# Altium PCB PCB1.PcbDoc
Units mm, origin at the board's own origin, x right, y up, seen from the top; angles counter-clockwise.
Board outline 56.1 x 54.2 mm, 2 copper layers (Top Layer, Bottom Layer); 76 components, 101 nets, 286 pads, 89 vias.
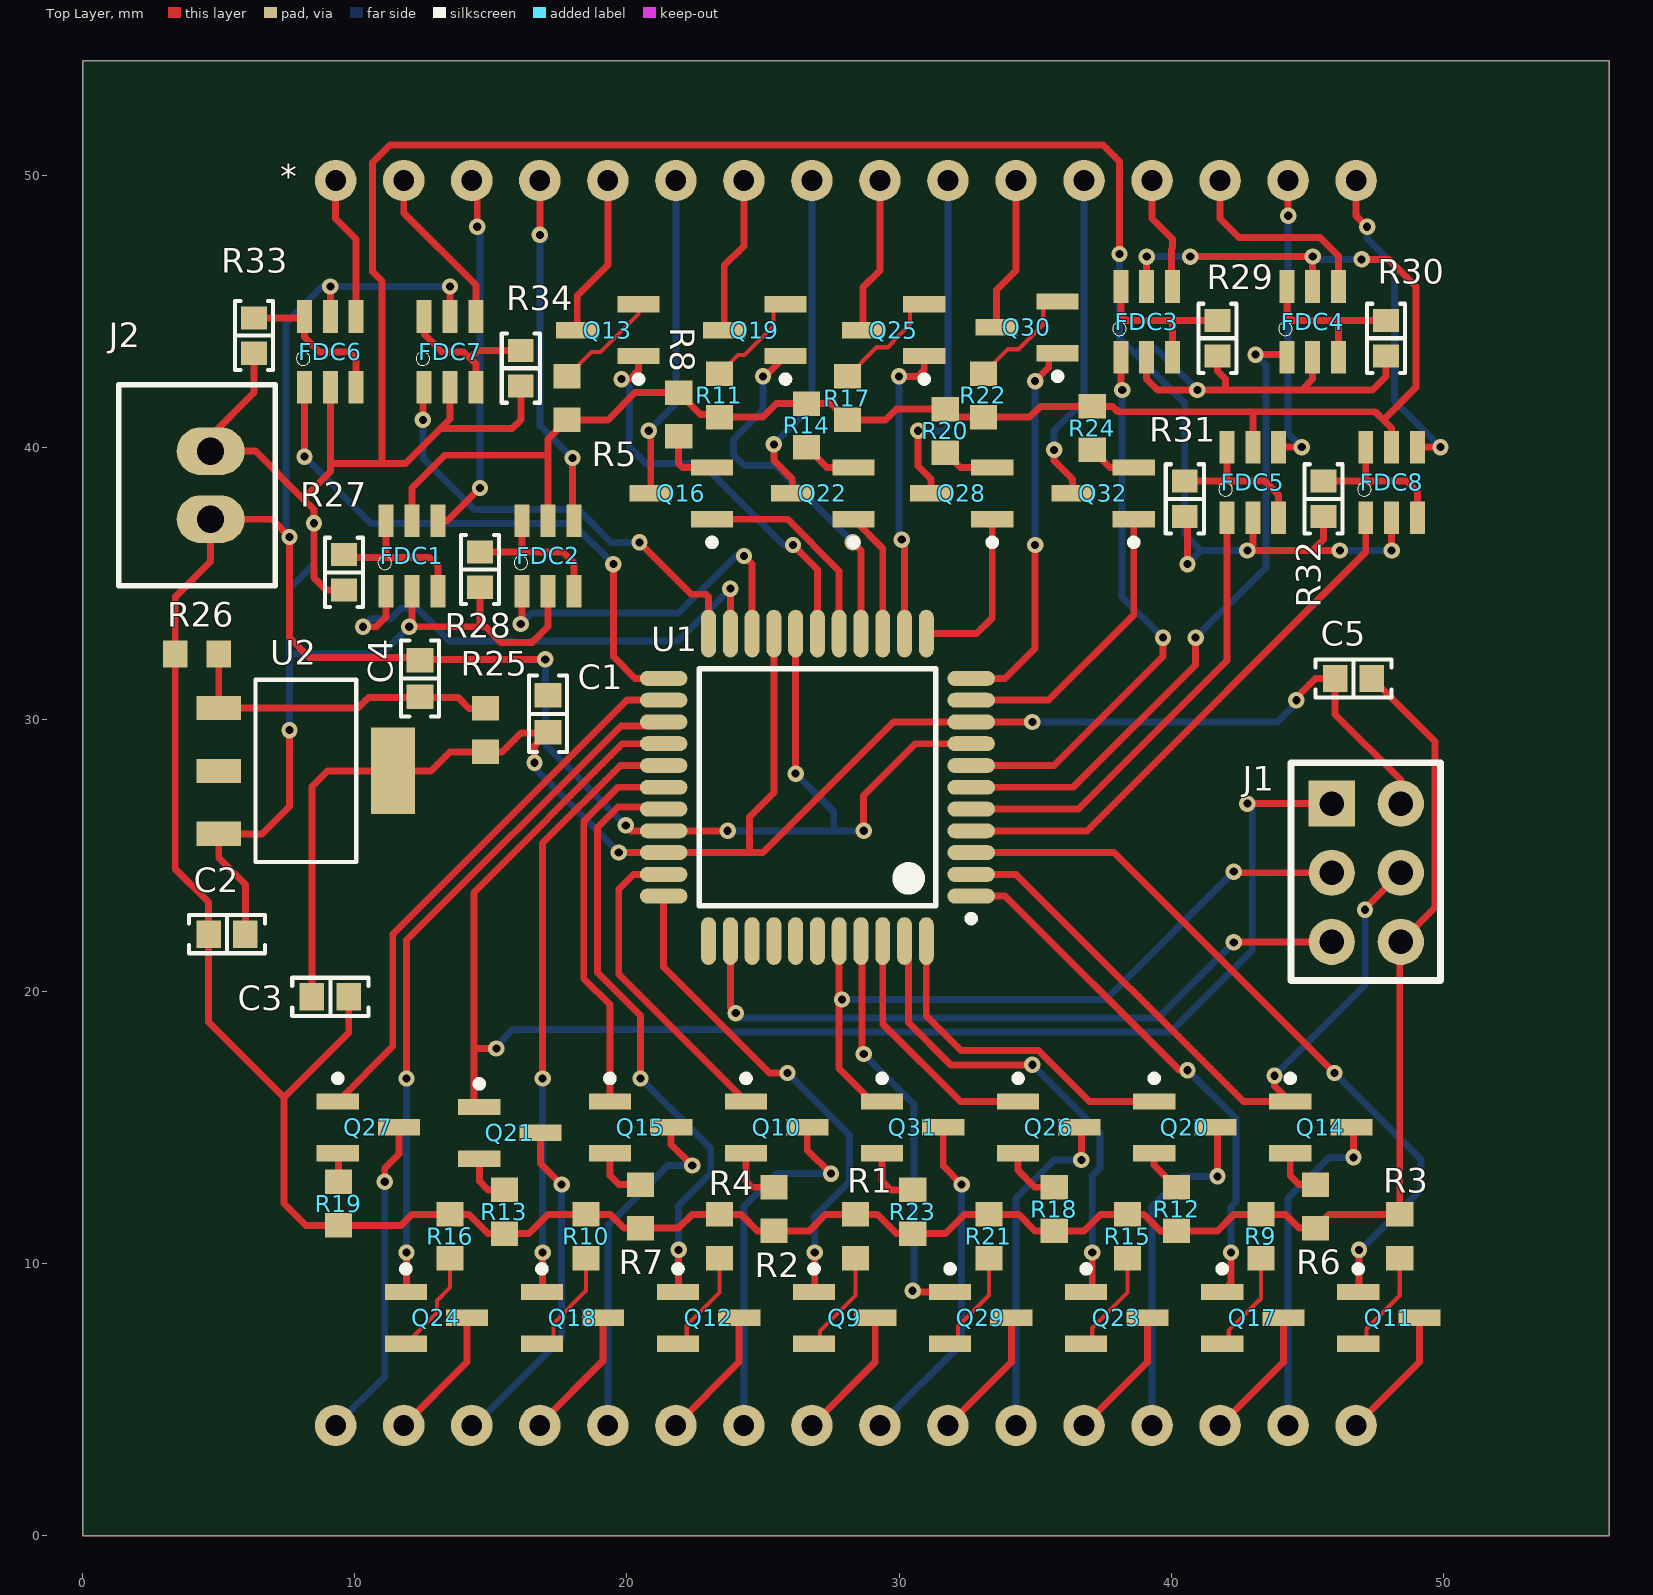
[diagram p0: Top Layer view]
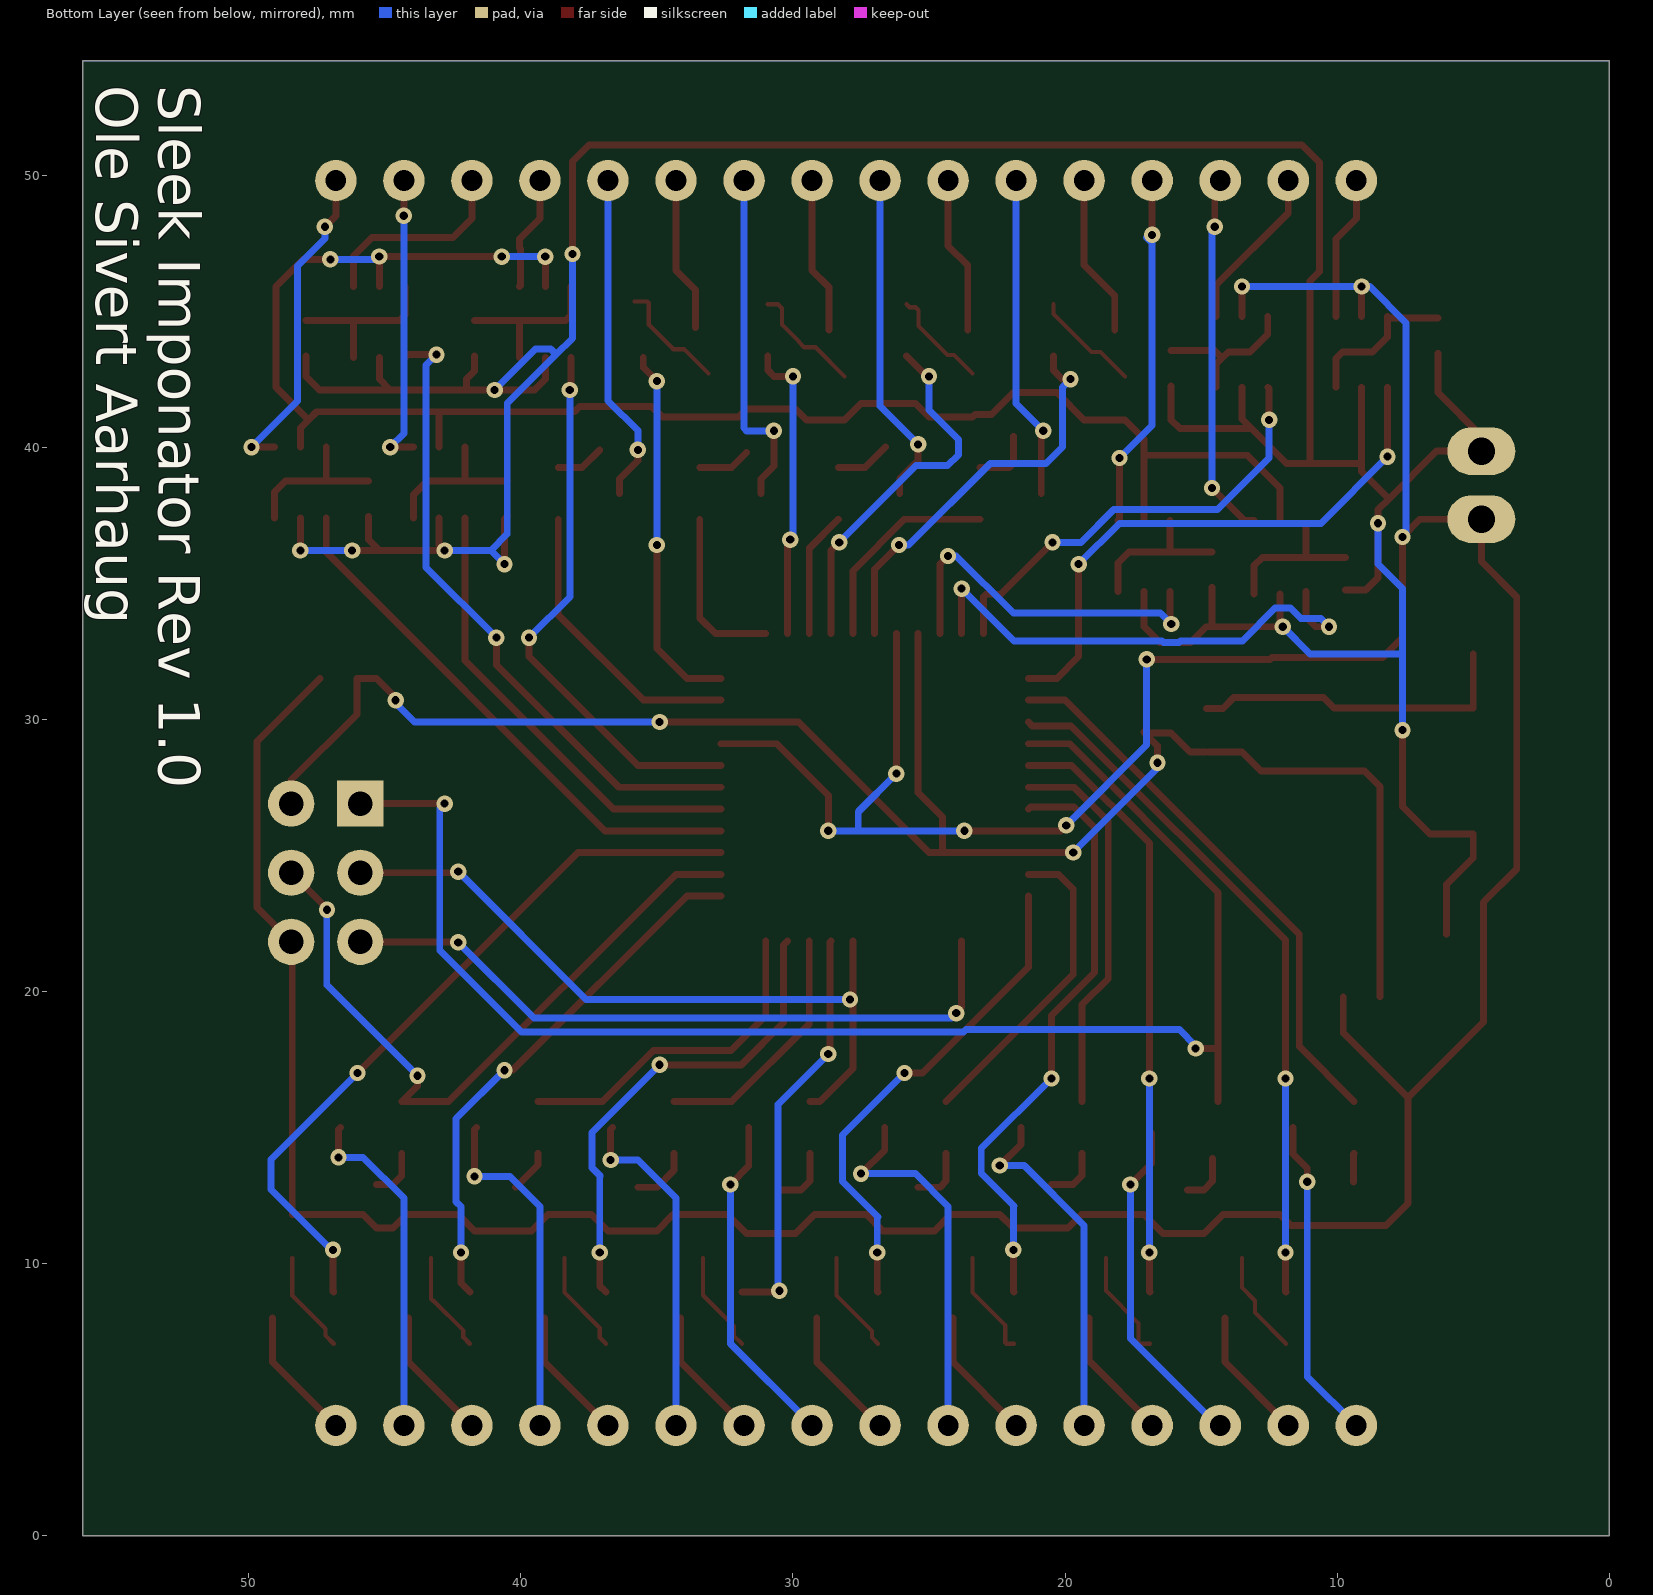
[diagram p1: Bottom Layer view, seen from below]
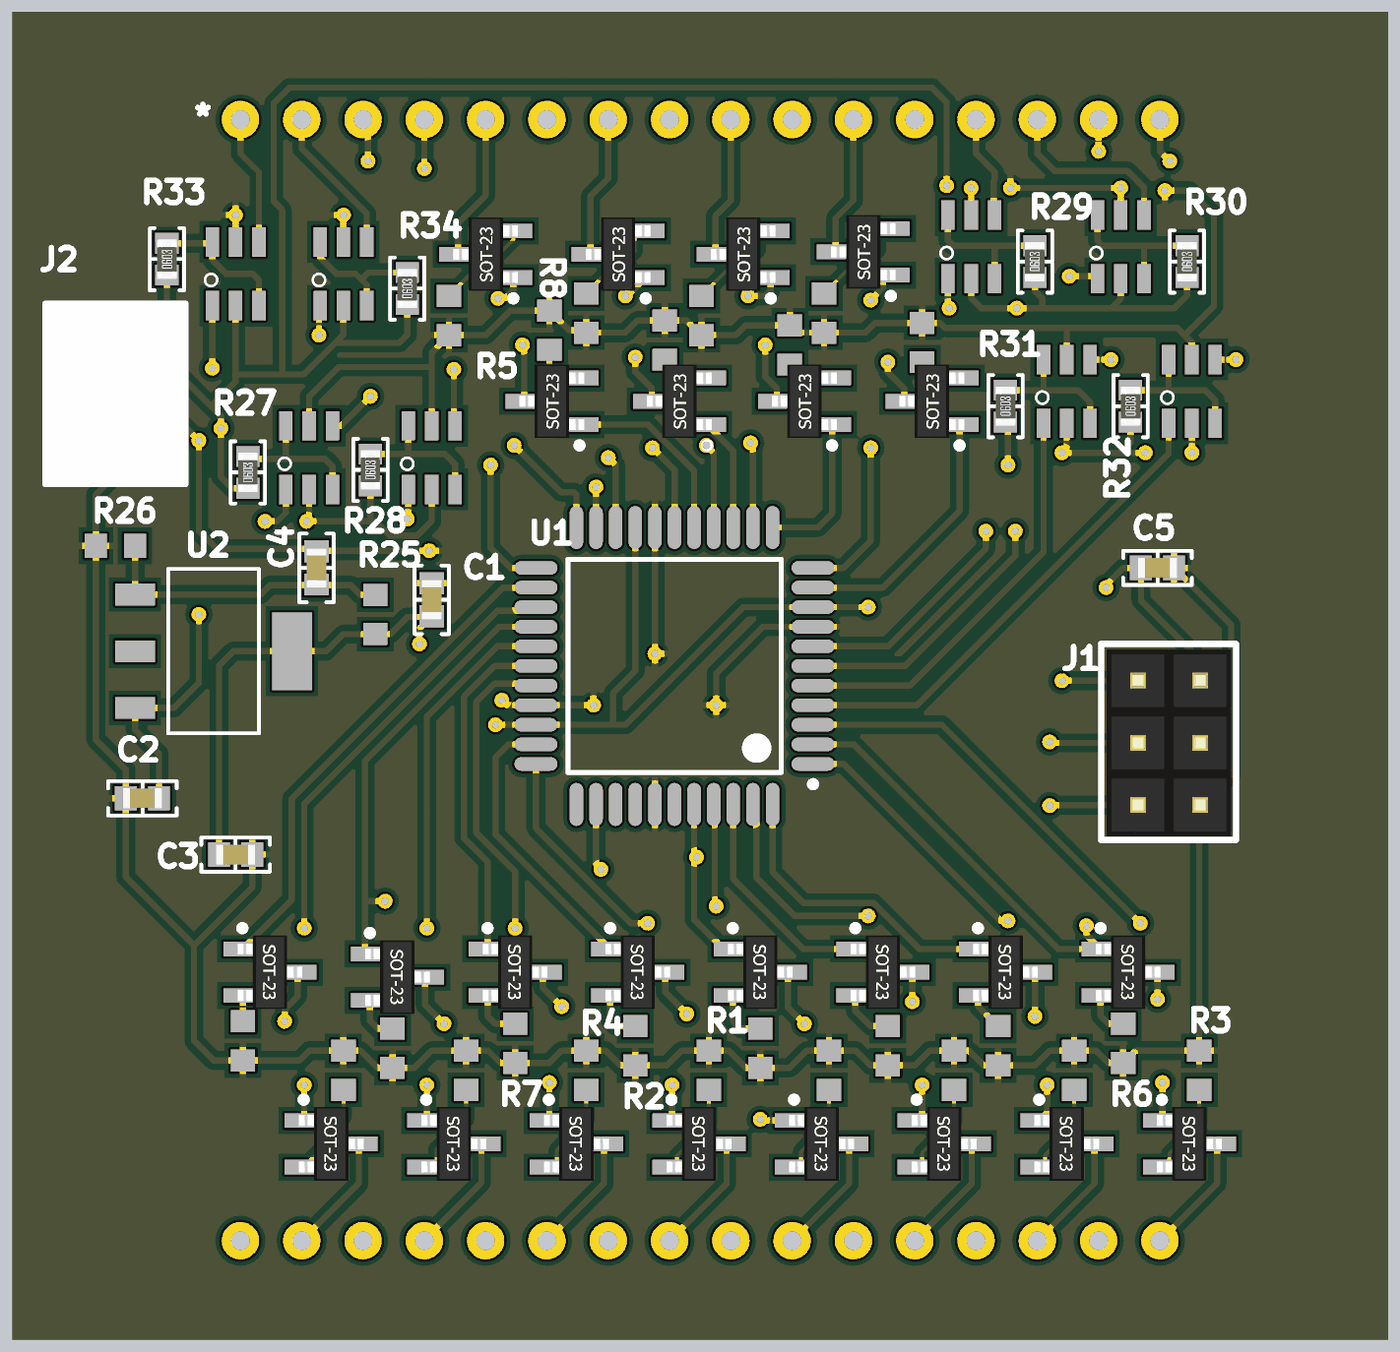
[diagram p2: 3D render of the assembled board from above, using the file's embedded part models]

## Layer stack, top to bottom
Top Solder: solder mask 0.0102, Solder Resist, Dk 3.5
Top Layer: signal copper 0.0356
Dielectric 1: dielectric 0.32, FR-4, Dk 4.8
Bottom Layer: signal copper 0.0356
Bottom Solder: solder mask 0.0102, Solder Resist, Dk 3.5

## Board outline
0,0 56.1,0 56.1,54.2 0,54.2

## Design rules (kind name [scope] priority, off if disabled: settings)
Clearance [All] p1: gap=0.254 ignorepadtopadclearanceinfootprint=FALSE except(0: Arc-Hole Track-Hole SMDPad-Hole THPad-Hole Via-Hole Fill-Hole Poly-Hole Region-Hole Text-Hole)
PolygonConnect [All] p1: connectstyle=Relief reliefconductorwidth=0.254 reliefentries=4 polygonreliefangle="90 Angle" airgapwidth=0.254
RoomDefinition Sheet2 [InComponentClass('Sheet2')] p1: confinementstyle=ConfineIn formatcopy=TRUE lockcomponents=FALSE outline -55,-46 -4.2,-46 -4.2,-20.6 -55,-20.6
RoomDefinition Sheet1 [InComponentClass('Sheet1')] p2: confinementstyle=ConfineIn formatcopy=TRUE lockcomponents=FALSE outline -55,-46 -4.2,-46 -4.2,-20.6 -55,-20.6
RoutingVias [All] p1: holewidth=0.3 width=0.6 viastyle="Through Hole" minholewidth=0.3 minwidth=0.6 maxholewidth=0.3 maxwidth=0.6
SolderMaskExpansion [All] p1: expansion=0.102
Width [All] p1: maxlimit=0.254 minlimit=0.154 preferedwidth=0.254
30 further rules are at their usual default settings.

## Classes and differential pairs
component class Sheet1: * C1 C2 C3 C4 C5 FDC1 FDC2 FDC3 FDC4 FDC5 FDC8 J1 J2 R25 R26 R27 R28 R29 R30 R31 R32 U1 U2
component class Sheet2: FDC6 FDC7 Q9 Q10 Q11 Q12 Q13 Q14 Q15 Q16 Q17 Q18 Q19 Q20 Q21 Q22 Q23 Q24 Q25 Q26 Q27 Q28 Q29 Q30 Q31 Q32 R1 R2 R3 R4 R5 R6 R7 R8 R9 R10 R11 R12 R13 R14 R15 R16 R17 R18 R19 R20 R21 R22 R23 R24 R33 R34

## Components (designator, comment, footprint, x,y, rotation, side; value= is the part's Value field where it differs from the comment)
* "2088RGB 8*8 Matrix" PCBComponent_1 -1.703,-1.954 r0 top locked
C1 "100nF" "CAP 0603/1608" 17.1,30.2 r90 top
C2 "100uF" "CAP 0603/1608" 5.3,22.1 r180 top
C3 "10uF" "CAP 0603/1608" 9.1,19.8 r0 top
C4 "?" "CAP 0603/1608" 12.4,31.5 r90 top
C5 "100nF" "CAP 0603/1608" 46.7,31.5 r0 top
FDC1 "N&P-Channel MOSFET IC" SSOT-6 12.1,36 r0 top
FDC2 "N&P-Channel MOSFET IC" SSOT-6 17.1,36 r0 top
FDC3 "N&P-Channel MOSFET IC" SSOT-6 39.1,44.6 r0 top
FDC4 "N&P-Channel MOSFET IC" SSOT-6 45.2,44.6 r0 top
FDC5 "N&P-Channel MOSFET IC" SSOT-6 43,38.7 r0 top
FDC6 "N&P-Channel MOSFET IC" SSOT-6 9.1,43.5 r0 top
FDC7 "N&P-Channel MOSFET IC" SSOT-6 13.5,43.5 r0 top
FDC8 "N&P-Channel MOSFET IC" SSOT-6 48.1,38.7 r0 top
J1 "AVR_SPI_HDR_6P" HEADER_3x2 45.9,26.9 r270 top
J2 "B2B-XH-A(LF)(SN)" "JST XH B2B-XH-A" 4.7,38.6 r270 top
Q9 "TSM2314" SOT95P280X130-3N 28,8 r0 top
Q10 "TSM2314" SOT95P280X130-3N 25.5,15 r0 top
Q11 "TSM2314" SOT95P280X130-3N 48,8 r0 top
Q12 "TSM2314" SOT95P280X130-3N 23,8 r0 top
Q13 "TSM2314" SOT95P280X130-3N 19.3,44.3 r180 top
Q14 "TSM2314" SOT95P280X130-3N 45.5,15 r0 top
Q15 "TSM2314" SOT95P280X130-3N 20.5,15 r0 top
Q16 "TSM2314" SOT95P280X130-3N 22,38.3 r180 top
Q17 "TSM2314" SOT95P280X130-3N 43,8 r0 top
Q18 "TSM2314" SOT95P280X130-3N 18,8 r0 top
Q19 "TSM2314" SOT95P280X130-3N 24.7,44.3 r180 top
Q20 "TSM2314" SOT95P280X130-3N 40.5,15 r0 top
Q21 "TSM2314" SOT95P280X130-3N 15.7,14.8 r0 top
Q22 "TSM2314" SOT95P280X130-3N 27.2,38.3 r180 top
Q23 "TSM2314" SOT95P280X130-3N 38,8 r0 top
Q24 "TSM2314" SOT95P280X130-3N 13,8 r0 top
Q25 "TSM2314" SOT95P280X130-3N 29.8,44.3 r180 top
Q26 "TSM2314" SOT95P280X130-3N 35.5,15 r0 top
Q27 "TSM2314" SOT95P280X130-3N 10.5,15 r0 top
Q28 "TSM2314" SOT95P280X130-3N 32.3,38.3 r180 top
Q29 "TSM2314" SOT95P280X130-3N 33,8 r0 top
Q30 "TSM2314" SOT95P280X130-3N 34.7,44.4 r180 top
Q31 "TSM2314" SOT95P280X130-3N 30.5,15 r0 top
Q32 "TSM2314" SOT95P280X130-3N 37.5,38.3 r180 top
R1 "Resistor" RESC0603(1608)_N 28.4,11 r90 top value=46R
R2 "Resistor" RESC0603(1608)_N 25.4,12 r270 top value=46R
R3 "Resistor" RESC0603(1608)_N 48.4,11 r90 top value=46R
R4 "Resistor" RESC0603(1608)_N 23.4,11 r90 top value=46R
R5 "Resistor" RESC0603(1608)_N 17.8,41.8 r270 top value=46R
R6 "Resistor" RESC0603(1608)_N 45.3,12.1 r270 top value=46R
R7 "Resistor" RESC0603(1608)_N 20.5,12.1 r270 top value=46R
R8 "Resistor" RESC0603(1608)_N 21.9,41.2 r90 top value=46R
R9 "Resistor" RESC0603(1608)_N 43.3,11 r90 top value=24R
R10 "Resistor" RESC0603(1608)_N 18.5,11 r90 top value=24R
R11 "Resistor" RESC0603(1608)_N 23.4,41.9 r270 top value=24R
R12 "Resistor" RESC0603(1608)_N 40.2,12 r270 top value=24R
R13 "Resistor" RESC0603(1608)_N 15.5,11.9 r270 top value=24R
R14 "Resistor" RESC0603(1608)_N 26.6,40.8 r90 top value=24R
R15 "Resistor" RESC0603(1608)_N 38.4,11 r90 top value=24R
R16 "Resistor" RESC0603(1608)_N 13.5,11 r90 top value=24R
R17 "Resistor" RESC0603(1608)_N 28.1,41.8 r270 top value=24R
R18 "Resistor" RESC0603(1608)_N 35.7,12 r270 top value=24R
R19 "Resistor" RESC0603(1608)_N 9.4,12.2 r270 top value=24R
R20 "Resistor" RESC0603(1608)_N 31.7,40.6 r90 top value=24R
R21 "Resistor" RESC0603(1608)_N 33.3,11 r90 top value=24R
R22 "Resistor" RESC0603(1608)_N 33.1,41.9 r270 top value=24R
R23 "Resistor" RESC0603(1608)_N 30.5,11.9 r270 top value=24R
R24 "Resistor" RESC0603(1608)_N 37.1,40.7 r90 top value=24R
R25 "Resistor" RESC0603(1608)_N 14.8,29.6 r270 top value=?
R26 "Resistor" RESC0603(1608)_N 4.2,32.4 r0 top value=?
R27 "10K" "RES 0603/1608" 9.6,35.4 r90 top
R28 "10K" "RES 0603/1608" 14.6,35.5 r90 top
R29 "10K" "RES 0603/1608" 41.7,44 r90 top
R30 "10K" "RES 0603/1608" 47.9,44 r90 top
R31 "10K" "RES 0603/1608" 40.5,38.1 r90 top
R32 "10K" "RES 0603/1608" 45.6,38.1 r90 top
R33 "10K" "RES 0603/1608" 6.3,44.1 r90 top
R34 "10K" "RES 0603/1608" 16.1,42.9 r90 top
U1 "ATxmega64A4-AU" 44A_N 27,27.5 r180 top
U2 "TLV1117-33CDCYR" SOT230P700X180-4N 8.2,28.1 r0 top

## Footprints (in the part's own frame and the unit in brackets; to place one, negate y for a bottom-side part, rotate by r counter-clockwise, add the part's x,y. Pads: shape width x height; smd on the part's side, far side on the other; paste and mask are expansions set on the pad)
44A_N [mm] "Thin QFP, 44-Leads, Body 10x10mm, Pitch 0.8mm, IPC Medium Density"
  oval 1.75x0.55 smd: 1(-5.65,4) 2(-5.65,3.2) 3(-5.65,2.4) 4(-5.65,1.6) 5(-5.65,0.8) 6(-5.65,0) 7(-5.65,-0.8) 8(-5.65,-1.6) 9(-5.65,-2.4) 10(-5.65,-3.2) 11(-5.65,-4) 23(5.65,-4) 24(5.65,-3.2) 25(5.65,-2.4) 26(5.65,-1.6) 27(5.65,-0.8) 28(5.65,0) 29(5.65,0.8) 30(5.65,1.6) 31(5.65,2.4) 32(5.65,3.2) 33(5.65,4)
  oval 0.55x1.75 smd: 12(-4,-5.65) 13(-3.2,-5.65) 14(-2.4,-5.65) 15(-1.6,-5.65) 16(-0.8,-5.65) 17(0,-5.65) 18(0.8,-5.65) 19(1.6,-5.65) 20(2.4,-5.65) 21(3.2,-5.65) 22(4,-5.65) 34(4,5.65) 35(3.2,5.65) 36(2.4,5.65) 37(1.6,5.65) 38(0.8,5.65) 39(0,5.65) 40(-0.8,5.65) 41(-1.6,5.65) 42(-2.4,5.65) 43(-3.2,5.65) 44(-4,5.65)
  silkscreen extent -5.77,-4.35 4.35,4.95, body extent -5,-5 5,5, height 1.2
"CAP 0603/1608" [mm] "Chip Capacitor, 2-Leads, Body 1.60x0.80mm, IPC Medium Density"
  rect 0.9x1 smd: 1(-0.675,0) 2(0.675,0)
  silkscreen extent -1.4,-0.7 1.4,0.7, body extent -0.8,-0.41 0.8,0.41, height 0.82
HEADER_3x2 [mm]
  rect 1.7x1.7 hole 0.9: 1(0,0)
  round 1.7 hole 0.9: 2(0,2.54) 3(2.54,0) 4(2.54,2.54) 5(5.08,0) 6(5.08,2.54)
  silkscreen extent -1.5,-1.5 6.5,4, body extent -1.27,-1.27 6.35,3.81, height 8.45
"JST XH B2B-XH-A" [mm]
  oval 1.75x2.5 hole 1: 1(-1.25,0) 2(1.25,0)
  silkscreen extent -3.7,-3.38 3.7,2.38, body extent -3.7,-3.38 3.7,2.38, height 7
PCBComponent_1 [mil]
  round 60 hole 30: 1(433.07,236.22) 2(531.5,236.22) 3(629.92,236.22) 4(728.35,236.22) 5(826.77,236.22) 6(925.2,236.22) 7(1023.62,236.22) 8(1122.05,236.22) 9(1220.47,236.22) 10(1318.9,236.22) 11(1417.32,236.22) 12(1515.75,236.22) 13(1614.17,236.22) 14(1712.6,236.22) 15(1811.02,236.22) 16(1909.45,236.22) 17(1909.45,2037.4) 18(1811.02,2037.4) 19(1712.6,2037.4) 20(1614.17,2037.4) 21(1515.75,2037.4) 22(1417.32,2037.4) 23(1318.9,2037.4) 24(1220.47,2037.4) 25(1122.05,2037.4) 26(1023.62,2037.4) 27(925.2,2037.4) 28(826.77,2037.4) 29(728.35,2037.4) 30(629.92,2037.4) 31(531.5,2037.4) 32(433.07,2037.4)
"RES 0603/1608" [mm] "Chip Resistor, 2-Leads, Body 1.60x0.80mm, IPC Medium Density"
  rect 0.85x0.95 smd: 1(-0.65,0) 2(0.65,0)
  silkscreen extent -1.27,-0.7 1.27,0.7, body extent -0.8,-0.4 0.8,0.4, height 0.45
RESC0603(1608)_N [mm] "Chip Resistor, Body 1.6x0.8mm, IPC Medium Density"
  rect 0.9x1 smd: 1(-0.8,0) 2(0.8,0)
  body extent -0.85,-0.47 0.85,0.47, height 0.6
SOT95P280X130-3N [mm] "SOT23, 3-Leads, Body 2,90x2,80mm, Pitch 0,95mm, IPC Medium Density"
  rect 1.55x0.6 smd: 1(-1.125,0.95) 2(1.125,0) 3(-1.125,-0.95)
  silkscreen extent -1.25,1.68 -1,1.92, body extent -1.32,-1.5 1.32,1.5, height 1.08
SOT230P700X180-4N [mil]
  rect 64x35 smd: 1(-126,91) 2(-126,0) 3(-126,-91)
  rect 64x125 smd: 4(126,0)
  silkscreen extent -73,-132 73,132
SSOT-6 [mm]
  rect 0.55x1.2 smd: 1(-0.95,-1.3) 2(0,-1.3) 3(0.95,-1.3) 4(0.95,1.3) 5(0,1.3) 6(-0.95,1.3)
  silkscreen extent -1.25,-0.5 -0.75,0

## Part data
*: "8*8 RGB Led Matrix", Model=2088RGB-1, Schematic=http://selfbuilt.net/datasheets/2088RGB-5-datasheet.jpg
C1 C2 C3 C4 C5: library part C1608C0G1H820J080AA, "CAP CER 82PF 50V C0G 0603", Device Package="0603 (1608 Metric)", Manufacturer="TDK Corporation", TemperatureCoefficient="C0G, NP0", TemperatureRange="-55C ~ 125C", Tolerance=5%, Voltage=50V, ComponentLink1Description=Datasheet, ComponentLink1URL=https://product.tdk.com/info/en/catalog/datasheets/mlcc_commercial_general_en.pdf, ComponentLink2Description="Digi-Key listing", Supplier 1=Digi-Key, Type=-
FDC1 FDC2 FDC3 FDC4 FDC5 FDC6 FDC7 FDC8: library part FDC633C, Package=SSOT-8, Schematic=http://www.mouser.com/ds/2/149/FDC6333C-1007236.pdf
J2: "CONN HEADER XH TOP 2POS 2.5MM", Colour=Natural, Manufacturer="JST Sales America Inc.", Supplier Part Number 1=455-2247-ND, ComponentLink1Description=Datasheet, ComponentLink1URL=http://www.jst-mfg.com/product/pdf/eng/eXH.pdf, ComponentLink2Description="Digi-Key Listing", ComponentLink2URL=http://www.digikey.com/product-detail/en/jst-sales-america-inc/B2B-XH-A(LF)(SN)/455-2247-ND/1651045, Contact Finish=Tin, Fastening Type="Detent Lock", Number Of Positions=2, Number Of Rows=1, PartId=16449, Part Number=B2B-XH-A(LF)(SN), Pitch="0.098\" (2.50mm)", Price=0,15, Series=XH, Supplier 1=Digi-Key, Type="Header, Shrouded"
Q9 Q10 Q11 Q12 Q13 Q14 Q15 Q16 Q17 Q18 Q19 Q20 Q21 Q22 Q23 Q24 Q25 Q26 Q27 Q28 Q29 Q30 Q31 Q32: library part 2389, "N-Channel MOSFET", id=2389, leverandor=Farnell, leverandor_varenr=1864589, navn=TSM2314, nokkelord=mosfet, pakke_opprettet="11.07.2014 23.17.33", pakke_opprettet_av=774, pakketype=SOT, pris=-1, produsent="Taiwan Semiconductor", symbol_opprettet="11.07.2014 23.17.04", symbol_opprettet_av=774
R27 R28 R29 R30 R31 R32 R33 R34: library part ERJ-3EKF2320V, "RES SMD 232 OHM 1% 1/10W 0603", Part Number=ERJ-3EKF2320V
U1: "8/16-bit AVR XMEGA A4 Microcontroller, 1.6-3.6V, 64KB + 4KB Flash, 2KB EEPROM, 4KB SRAM, 44-pin TQFP, Industrial Grade (-40°C to 85°C), Pb-Free", Supplier Part Number 1=ATXMEGA64A4-AU-ND, ComponentLink1Description="Manufacturer Link", ComponentLink1URL=http://www.atmel.com/products/avr/default.asp?, ComponentLink2Description="ATxmega16A4/32A4/64A4/128A4 Datasheet", ComponentLink2URL=http://www.atmel.com/dyn/resources/prod_documents/doc8069.pdf, ComponentLink3Description="Atmel.com Home", ComponentLink3URL=http://www.atmel.com, DatasheetVersion="revN, Feb-2010", PackageDescription="44-Pin Plastic Thin Profile Quad Flat Pack, 10 x 10 x 1.0 mm Body, 0.8 mm Pitch (TQFP)", PackageReference=44A, PackageVersion="rev.B, Oct-2001", Published=1-Apr-2010, Publisher="Altium Limited", Supplier 1=Digi-Key, Supplier 2=Farnell, Supplier 3=Mouser, Supplier Part Number 2=1748560, Supplier Part Number 3=556-ATXMEGA64A4-AU
U2: "IC REG LIN 3.3V 800MA SOT223-4", Package="SOT-223-4 Texas Instruments", Availability=Good, MF="Texas Instruments", MP=TLV1117-33CDCYR, Price="0.35 USD"

## Via types
v1: diameter 0.6, hole 0.3, Top Layer to Bottom Layer, 89 vias

## Nets (pads, with @x,y where several pads share a name; then routed paths per layer and width w, separated by ;. In a path a pad name is that pad's centre, name@x,y a point inside that pad or via, vN(x,y) a via of type N, cw(c..) or ccw(c..) an arc to the next point about the centre after c; other vN are vias at no path point)
GND: C1.2 C2.2 C3.2 C4.2 C5.2 FDC1.5 FDC2.5 FDC3.5 FDC4.5 FDC5.5 FDC6.5 FDC7.5 FDC8.5 J1.6 J2.2 R1.2 R2.2 R3.2 R4.2 R5.2 R6.2 R7.2 R8.2 R9.2 R10.2 R11.2 R12.2 R13.2 R14.2 R15.2 R16.2 R17.2 R18.2 R19.2 R20.2 R21.2 R22.2 R23.2 R24.2 R26.1 U1.8 U1.18 U1.30 U1.38 | length 224.5
  Top Layer w0.254: FDC6.5 v1(9.1,45.9) ; C3.2 9.775,18.475 7.4,16.1 ; FDC1.5 12.1,38.5 13.3,39.7 17.1,39.7 ; FDC7.5 v1(13.5,45.9) ; v1(17,32.2) 12.475,32.2 12.4,32.275 8.325,32.275 7.6,33 v1(7.6,36.7) 6.95,37.35 J2.2 4.7,35.8 3.4,34.5 R26.1 3.4,24.5 4.625,23.275 C2.2 4.625,18.875 7.4,16.1 ; FDC2.5 17.1,39.7 ; v1(19.956,26.1) 20.156,25.9 U1.30 v1(23.7,25.9) ; v1(26.2,28) U1.18 ; v1(28.7,25.9) 28.7,27.2 30.6,29.1 U1.8 ; FDC3.5 v1(39.1,47) ; v1(40.7,47) 40.708,47.008 v1(45.2,47.008) FDC4.5 ; FDC5.5 43,41.3 ; v1(47,46.9) 48,46.9 49,45.9 49,42.2 47.8,41 ; C5.2 49.7,29.175 49.7,23.08 J1.6 48.4,21.78 R3.2 45.8,11.8 R6.2 44.7,11.3 44.2,11.8 R9.2 42.3,11.8 41.7,11.2 R12.2 39.6,11.2 39,11.8 R15.2 37.4,11.8 36.8,11.2 R18.2 35,11.2 34.4,11.8 R21.2 32.4,11.8 31.7,11.1 R23.2 29.9,11.1 29.2,11.8 R1.2 27.3,11.8 26.7,11.2 R2.2 24.8,11.2 24.2,11.8 R4.2 22.4,11.8 21.9,11.3 R7.2 19.9,11.3 19.4,11.8 R10.2 17.1,11.8 16.4,11.1 R13.2 14.9,11.1 14.2,11.8 R16.2 12.1,11.8 11.7,11.4 R19.2 8.2,11.4 7.4,12.2 7.4,16.1 ; FDC8.5 48.1,40.7 47.8,41 ; 17.1,39.7 17.1,40.3 R5.2 19.3,41 20.3,42 R8.2 22.7,41.2 23.3,41.2 R11.2 25,41.1 25.5,41.6 R14.2 27.5,41.6 R17.2 29.5,41 29.9,41.4 R20.2 32,41.1 R22.2 34.8,41.1 35.2,41.5 R24.2 37.837,41.5 38.037,41.3 43,41.3 ; 43,41.3 47.5,41.3 47.8,41
  Bottom Layer w0.254: v1(7.6,36.7) 7.469,36.831 7.469,44.569 8.8,45.9 v1(9.1,45.9) v1(13.5,45.9) ; v1(17,32.2) 17,29.056 v1(19.956,26.1) ; v1(23.7,25.9) 27.6,25.9 ; v1(26.2,28) 27.6,26.6 27.6,25.9 ; v1(28.7,25.9) 27.6,25.9 ; v1(39.1,47) v1(40.7,47) ; v1(45.2,47.008) 45.308,46.9 v1(47,46.9)
GND_LCD_1: *.1 Q27.2 | length 11.9
  Top Layer w0.254: v1(11.1,13) 11.1,13.5 11.625,14.025 Q27.2
  Bottom Layer w0.254: *.1 11.1,5.849 v1(11.1,13)
GND_LCD_2: *.2 Q24.2 | length 4.9
  Top Layer w0.254: *.2 14.125,6.374 Q24.2
GND_LCD_3: *.3 Q21.2 | length 12.5
  Top Layer w0.254: Q21.2 16.825,13.675 v1(17.6,12.9)
  Bottom Layer w0.254: *.3@14.294,3.943 17.6,7.249 v1(17.6,12.9)
GND_LCD_4: *.4 Q18.2 | length 4.9
  Top Layer w0.254: *.4 16.797,4.097 19.125,6.425 Q18.2
GND_LCD_5: *.5 Q15.2 | length 13.1
  Top Layer w0.254: Q15.2 21.625,14.375 v1(22.4,13.6)
  Bottom Layer w0.254: *.5 19.297,11.397 21.5,13.6 v1(22.4,13.6)
GND_LCD_6: *.6 Q12.2 | length 4.9
  Top Layer w0.254: *.6 24.125,6.374 Q12.2
GND_LCD_7: *.7 Q10.2 | length 13.8
  Top Layer w0.254: Q10.2 26.625,14.175 v1(27.5,13.3)
  Bottom Layer w0.254: *.7 24.297,12.097 25.5,13.3 v1(27.5,13.3)
GND_LCD_8: *.8 Q9.2 | length 4.9
  Top Layer w0.254: *.8 29.125,6.374 Q9.2
GND_LCD_9: *.9 Q31.2 | length 12.5
  Top Layer w0.254: Q31.2 31.625,13.575 v1(32.3,12.9)
  Bottom Layer w0.254: *.9 *.9@29.4,4.149 ; *.9@29.4,4.149 32.3,7.049 v1(32.3,12.9)
GND_LCD_10: *.10 Q29.2 | length 4.9
  Top Layer w0.254: *.10 34.125,6.374 Q29.2
GND_LCD_11: *.11 Q26.2 | length 12.6
  Top Layer w0.254: Q26.2 36.7,14.925 v1(36.7,13.8)
  Bottom Layer w0.254: *.11 34.297,12.4 34.294,12.4 35.694,13.8 v1(36.7,13.8)
GND_LCD_12: *.12 Q23.2 | length 4.9
  Top Layer w0.254: *.12 39.125,6.374 Q23.2
GND_LCD_13: *.13 Q20.2 | length 12.6
  Top Layer w0.254: Q20.2 41.7,14.925 v1(41.7,13.2)
  Bottom Layer w0.254: *.13@39.294,4.143 39.294,12.094 40.4,13.2 v1(41.7,13.2)
GND_LCD_14: *.14 Q17.2 | length 4.9
  Top Layer w0.254: *.14 44.125,6.374 Q17.2
GND_LCD_15: *.15 Q14.2 | length 12.5
  Top Layer w0.254: Q14.2 46.7,14.925 v1(46.7,13.9)
  Bottom Layer w0.254: *.15 44.297,12.4 44.294,12.4 45.794,13.9 v1(46.7,13.9)
GND_LCD_16: *.16 Q11.2 | length 4.9
  Top Layer w0.254: *.16 49.125,6.374 Q11.2
GND_LCD_21: *.21 Q32.2 | length 12.2
  Top Layer w0.254: v1(35.7,39.9) 35.7,39.5 36.375,38.825 Q32.2
  Bottom Layer w0.254: v1(35.7,39.9) 35.7,40.606 36.797,41.703 *.21
GND_LCD_22: *.22 Q30.2 | length 5.7
  Top Layer w0.254: Q30.2 33.575,45.775 34.297,46.497 *.22
GND_LCD_23: *.23 Q28.2 | length 12.7
  Top Layer w0.254: v1(30.7,40.6) 30.7,39.3 31.175,38.825 Q28.2
  Bottom Layer w0.254: v1(30.7,40.6) 31.7,40.6 31.797,40.697 *.23
GND_LCD_24: *.24 Q25.2 | length 5.8
  Top Layer w0.254: Q25.2 28.675,45.875 29.297,46.497 *.24
GND_LCD_25: *.25 Q22.2 | length 12.4
  Top Layer w0.254: v1(25.4,40.1) 25.4,39.5 26.075,38.825 Q22.2
  Bottom Layer w0.254: v1(25.4,40.1) 25.394,40.1 26.797,41.503 *.25
GND_LCD_26: *.26 Q19.2 | length 5.8
  Top Layer w0.254: Q19.2 23.575,46.675 24.297,47.397 *.26
GND_LCD_27: *.27 Q16.2 | length 12.1
  Top Layer w0.254: v1(20.8,40.6) 20.875,40.675 Q16.2
  Bottom Layer w0.254: v1(20.8,40.6) 21.797,41.597 *.27
GND_LCD_28: *.28 Q13.2 | length 6
  Top Layer w0.254: Q13.2 18.175,45.575 19.297,46.697 *.28
GND_LCD_SIGN_1: Q27.1 U1.24 | length 20.5
  Top Layer w0.254: Q27.1 11.392,17.967 11.392,22.091 20.001,30.7 U1.24
GND_LCD_SIGN_2: Q24.1 U1.25 | length 25.7
  Top Layer w0.254: Q24.1 11.9,8.975 v1(11.9,10.4) ; v1(11.9,16.8) 11.9,21.88 19.776,29.756 21.206,29.756 U1.25
  Bottom Layer w0.254: v1(11.9,10.4) 11.9,16.75 11.875,16.775 v1(11.9,16.8)
GND_LCD_SIGN_3: J1.1 Q21.1 U1.26 | length 55.8
  Top Layer w0.254: Q21.1@14.375,15.95 14.375,17.8 ; v1(15.2,17.9) 14.475,17.9 14.375,17.8 ; U1.26 19.838,29.1 14.375,23.637 14.375,17.8 ; v1(42.8,26.9) J1.1
  Bottom Layer w0.254: v1(15.2,17.9) 15.2,18 15.8,18.6 23.637,18.6 23.726,18.511 39.974,18.511 42.981,21.518 42.981,26.719 v1(42.8,26.9)
GND_LCD_SIGN_4: Q18.1 U1.27 | length 22.2
  Top Layer w0.254: Q18.1 16.9,8.975 v1(16.9,10.4) ; v1(16.9,16.8) 16.9,25.443 19.757,28.3 U1.27
  Bottom Layer w0.254: v1(16.9,10.4) 16.9,16.75 16.875,16.775 v1(16.9,16.8)
GND_LCD_SIGN_5: Q15.1 U1.28 | length 14.1
  Top Layer w0.254: Q15.1 19.375,19.513 18.411,20.477 18.411,26.236 19.675,27.5 U1.28
GND_LCD_SIGN_6: Q12.1 U1.29 | length 22.1
  Top Layer w0.254: v1(20.5,16.8) 20.5,19.107 18.919,20.688 18.919,26.026 19.674,26.781 21.269,26.781 U1.29 ; Q12.1 21.9,8.975 v1(21.9,10.5)
  Bottom Layer w0.254: v1(20.5,16.8) 23.081,14.219 23.081,13.318 21.875,12.112 21.9,12.087 v1(21.9,10.5)
GND_LCD_SIGN_7: Q10.1 U1.32 | length 11.6
  Top Layer w0.254: U1.32 20.238,24.3 19.7,23.762 19.7,20.625 Q10.1
GND_LCD_SIGN_8: Q9.1 U1.33 | length 18.3
  Top Layer w0.254: U1.33 21.35,20.887 25.237,17 v1(25.9,17) ; Q9.1 26.9,8.975 v1(26.9,10.4)
  Bottom Layer w0.254: v1(25.9,17) 28.181,14.719 28.181,13.018 26.875,11.712 26.9,11.687 v1(26.9,10.4)
GND_LCD_SIGN_9: J1.3 Q31.1 U1.40 | length 26.7
  Top Layer w0.254: U1.40 27.8,17.163 29.013,15.95 Q31.1 ; v1(42.3,24.4) 42.34,24.36 J1.3
  Bottom Layer w0.254: v1(27.9,19.7) 37.6,19.7 v1(42.3,24.4)
GND_LCD_SIGN_10: Q29.1 U1.41 | length 15.1
  Top Layer w0.254: U1.41 28.639,21.811 28.639,17.761 v1(28.7,17.7) ; v1(30.5,9) 30.55,8.95 Q29.1
  Bottom Layer w0.254: v1(28.7,17.7) 30.55,15.85 v1@30.55,9
GND_LCD_SIGN_11: Q26.1 U1.42 | length 9.2
  Top Layer w0.254: U1.42 29.4,18.8 32.25,15.95 Q26.1
GND_LCD_SIGN_12: Q23.1 U1.43 | length 17.9
  Top Layer w0.254: U1.43 30.344,21.706 30.344,18.856 31.9,17.3 v1(34.9,17.3) ; Q23.1 37.1,9.175 v1(37.1,10.4)
  Bottom Layer w0.254: v1(34.9,17.3) 37.381,14.819 37.381,13.518 37.082,13.218 37.1,13.2 v1(37.1,10.4)
GND_LCD_SIGN_13: Q20.1 U1.44 | length 12.4
  Top Layer w0.254: U1.44 31,19.1 32.269,17.831 35.12,17.831 37.001,15.95 Q20.1
GND_LCD_SIGN_14: Q17.1 U1.1 | length 19.7
  Top Layer w0.254: U1.1 33.9,23.5 40.3,17.1 v1(40.6,17.1) ; Q17.1 42.2,9.275 v1(42.2,10.4)
  Bottom Layer w0.254: v1(40.6,17.1) 42.381,15.319 42.381,12.268 42.2,12.087 v1(42.2,10.4)
GND_LCD_SIGN_15: J1.4 Q14.1 U1.2 | length 25.8
  Top Layer w0.254: U1.2 34.3,24.3 42.65,15.95 Q14.1 43.8,16.525 v1(43.8,16.9) ; v1(47.12,23) 47.1,23.02 J1.4
  Bottom Layer w0.254: v1(43.8,16.9) 47.131,20.231 47.131,22.989 v1(47.12,23)
GND_LCD_SIGN_16: Q11.1 U1.3 | length 27.2
  Top Layer w0.254: U1.3 37.9,25.1 v1(46,17) ; Q11.1 46.9,8.975 v1(46.9,10.5)
  Bottom Layer w0.254: v1(46,17) 49.181,13.819 49.181,12.718 46.9,10.437 v1(46.9,10.5)
GND_LCD_SIGN_21: Q32.1 U1.10 | length 10.8
  Top Layer w0.254: U1.10 35.5,30.7 38.625,33.825 Q32.1
GND_LCD_SIGN_22: Q30.1 U1.11 | length 13.7
  Top Layer w0.254: U1.11 33.9,31.5 35,32.6 v1(35,36.4) ; v1(35,42.425) 35.5,42.925 Q30.1@35.5,43.3
  Bottom Layer w0.254: v1(35,36.4) v1(35,42.425)
GND_LCD_SIGN_23: Q28.1 U1.12 | length 6.3
  Top Layer w0.254: U1.12 32.85,33.15 33.425,33.725 Q28.1
GND_LCD_SIGN_24: Q25.1 U1.13 | length 11.1
  Top Layer w0.254: v1(30,42.6) 30.7,42.6 30.925,42.825 Q25.1 ; v1(30.1,36.6) 30.2,36.5 U1.13
  Bottom Layer w0.254: v1(30,42.6) 30,36.7 v1(30.1,36.6)
GND_LCD_SIGN_25: Q22.1 U1.14 | length 4.6
  Top Layer w0.254: Q22.1 29.4,36.275 U1.14
GND_LCD_SIGN_26: Q19.1 U1.15 | length 13.7
  Top Layer w0.254: v1(25,42.6) 25.075,42.6 Q19.1 ; v1(28.3,36.5) 28.6,36.2 U1.15
  Bottom Layer w0.254: v1(25,42.6) 25,41.363 23.919,40.282 23.919,39.718 24.318,39.319 25.481,39.319 v1(28.3,36.5)
GND_LCD_SIGN_27: Q16.1 U1.16 | length 7.8
  Top Layer w0.254: Q16.1 25.901,37.35 27.8,35.451 U1.16
GND_LCD_SIGN_28: Q13.1 U1.17 | length 15
  Top Layer w0.254: v1(19.8,42.5) 19.808,42.508 20.108,42.508 20.425,42.825 Q13.1 ; v1(26.1,36.4) 27,35.5 U1.17
  Bottom Layer w0.254: v1(19.8,42.5) 20.1,42.2 20.1,40 20.7,39.4 22.749,39.4 25.749,36.4 v1(26.1,36.4)
"Matrix VCC": C2.1 FDC1.2 FDC2.2 FDC3.2 FDC4.2 FDC5.2 FDC6.2 FDC7.2 FDC8.2 J2.1 R27.1 R28.1 R29.1 R30.1 R31.1 R32.1 R33.1 R34.1 U2.3 | length 144.7
  Top Layer w0.254: C2.1 5.975,23.925 5,24.9 U2.3 6.589,25.789 7.6,26.8 v1(7.6,29.6) ; R33.1 6.3,42 4.7,40.4 J2.1 6.35,39.85 8.1,38.1 ; FDC6.2 9.1,39.4 ; R27.1@9.7,34.75 8.95,34.75 8.5,35.2 v1(8.5,37.2) 8.5,37.7 8.1,38.1 ; FDC1.2@12.1,34.6 12.1,33.5 v1(12,33.4) 14.6,33.4 ; FDC7.2 13.5,41.037 13.182,40.718 ; R28.1 14.6,33.4 ; R34.1 16.1,41 15.781,40.681 13.219,40.681 13.182,40.718 ; FDC2.2 17.1,33.4 16.519,32.819 15.381,32.819 14.8,33.4 14.6,33.4 ; v1(38.1,47.1) 38.1,50.5 37.5,51.1 11.3,51.1 10.654,50.454 10.654,46.446 11,46.1 11,39.4 ; FDC3.2 39.1,42.5 39.5,42.1 v1(40.962,42.1) 42,42.1 ; R31.1 40.6,37.35 v1(40.6,35.7) ; R29.1 41.7,42.8 42,42.5 42,42.1 ; FDC5.2 43,36.4 v1(42.8,36.2) 45.2,36.2 ; FDC4.2 45.2,42.5 44.8,42.1 ; R32.1 45.6,36.6 45.2,36.2 ; v1(46.2,36.2) 45.2,36.2 ; R30.1 47.9,42.6 47.4,42.1 44.8,42.1 ; v1(48.1,36.2) FDC8.2 ; 8.1,38.1 9.1,39.1 9.1,39.4 ; 9.1,39.4 11,39.4 ; 11,39.4 11.863,39.4 13.182,40.718 ; 42,42.1 44.8,42.1
  Bottom Layer w0.254: v1(7.6,29.6) 7.6,32.4 ; v1(8.5,37.2) 8.5,35.7 7.6,34.8 7.6,32.4 ; v1(12,33.4) 11,32.4 7.6,32.4 ; v1(38.1,47.1) 38.1,44 38.7,43.4 ; v1(40.6,35.7) 41.1,36.2 ; v1(40.962,42.1) 39.462,43.6 38.9,43.6 38.7,43.4 ; v1(42.8,36.2) 41.1,36.2 ; v1(46.2,36.2) v1(48.1,36.2) ; 38.7,43.4 40.5,41.6 40.5,36.8 41.1,36.2
NetC4_1: C4.1 R25.1 R26.2 U2.1 | length 12.1
  Top Layer w0.254: R26.2 U2.1 10.111,30.411 10.5,30.8 13.8,30.8 14.2,30.4 R25.1
NetFDC1_3: FDC1.3 FDC1.6 R27.2 | length 5.8
  Top Layer w0.254: R27.2@9.7,35.95 11.1,35.95 ; FDC1.6@11.15,37.2 11.15,36 11.1,35.95 ; FDC1.3@13.05,34.6 FDC1.3 13.05,35.65 12.75,35.95 11.1,35.95
NetFDC2_3: FDC2.3 FDC2.6 R28.2 | length 5.8
  Top Layer w0.254: R28.2 16.125,36.15 ; FDC2.6 16.15,36.175 16.125,36.15 ; FDC2.3 18.05,35.75 17.65,36.15 16.125,36.15
NetFDC3_3: FDC3.3 FDC3.6 R29.2 | length 6.1
  Top Layer w0.254: FDC3.6 38.15,44.85 38.35,44.65 40,44.65 ; FDC3.3 40.05,44.6 40,44.65 ; R29.2 40,44.65
NetFDC4_3: FDC4.3 FDC4.6 R30.2 | length 6.2
  Top Layer w0.254: FDC4.6 44.25,44.85 44.45,44.65 46.1,44.65 ; FDC4.3 46.15,44.6 46.1,44.65 ; R30.2 46.1,44.65
NetFDC5_3: FDC5.3 FDC5.6 R31.2 | length 5.8
  Top Layer w0.254: R31.2 42,38.75 ; FDC5.6 42.05,38.8 42,38.75 ; FDC5.3 43.95,38.25 43.45,38.75 42,38.75
NetFDC6_3: FDC6.3 FDC6.6 R33.2 | length 5.9
  Top Layer w0.254: R33.2 8.1,44.75 FDC6.6 8.15,44.05 8.7,43.5 9.8,43.5 10.05,43.25 FDC6.3
NetFDC7_3: FDC7.3 FDC7.6 R34.2 | length 5.8
  Top Layer w0.254: FDC7.6 12.55,44.15 13.2,43.5 14,43.5 14.225,43.275 ; FDC7.3 14.45,43.05 14.225,43.275 ; R34.2 14.5,43.55 14.225,43.275
NetFDC8_3: FDC8.3 FDC8.6 R32.2 | length 5.8
  Top Layer w0.254: R32.2 47.2,38.75 ; FDC8.6 47.15,38.8 47.2,38.75 ; FDC8.3 49.05,38.35 48.65,38.75 47.2,38.75
NetJ1_5: J1.5 U1.35 | length 25.9
  Top Layer w0.254: U1.35 23.8,19.4 v1(24,19.2) ; v1(42.3,21.8) 42.32,21.82 J1.5
  Bottom Layer w0.254: v1(24,19.2) 24.181,19.019 39.519,19.019 v1(42.3,21.8)
NetQ9_3: Q9.3 R1.1 | length 3.8
  Top Layer w0.154: Q9.3 27.1,7.275 27.1,7.518 28.4,8.818 R1.1
NetQ10_3: Q10.3 R2.1 | length 2.1
  Top Layer w0.254: Q10.3 24.375,13.025 24.6,12.8 R2.1
NetQ11_3: Q11.3 R3.1 | length 3.8
  Top Layer w0.154: Q11.3 47.182,7.357 47.182,7.6 48.4,8.818 R3.1
NetQ12_3: Q12.3 R4.1 | length 3.9
  Top Layer w0.154: Q12.3 22.15,7.05 22.2,7.1 22.2,7.732 23.4,8.932 R4.1
NetQ13_3: Q13.3 R5.1 | length 3.9
  Top Layer w0.154: R5.1 18.7,43.5 19.032,43.5 20.425,44.893 Q13.3
NetQ14_3: Q14.3 R6.1 | length 1.9
  Top Layer w0.254: Q14.3 44.375,13.225 44.7,12.9 R6.1
NetQ15_3: Q15.3 R7.1 | length 2.1
  Top Layer w0.254: Q15.3 19.375,13.225 19.7,12.9 R7.1
NetQ16_3: Q16.3 R8.1 | length 2.3
  Top Layer w0.254: R8.1 21.9,39.4 22.05,39.25 Q16.3
NetQ17_3: Q17.3 R9.1 | length 3.8
  Top Layer w0.154: Q17.3 42.112,7.288 42.112,7.531 43.213,8.631 43.231,8.631 43.3,8.7 R9.1
NetQ18_3: Q18.3 R10.1 | length 4.1
  Top Layer w0.154: Q18.3 17.3,7.05 17.3,7.8 18.5,9 R10.1
NetQ19_3: Q19.3 R11.1 | length 3.8
  Top Layer w0.154: R11.1 24.084,43.384 24.316,43.384 25.381,44.449 25.381,45.028 25.492,45.139 25.714,45.139 Q19.3
NetQ20_3: Q20.3 R12.1 | length 1.6
  Top Layer w0.254: Q20.3 39.375,13.625 R12.1
NetQ21_3: Q21.3 R13.1 | length 1.9
  Top Layer w0.254: Q21.3 14.575,13.025 14.9,12.7 R13.1
NetQ22_3: Q22.3 R14.1 | length 2
  Top Layer w0.254: R14.1 27.35,39.25 Q22.3
NetQ23_3: Q23.3 R15.1 | length 3.8
  Top Layer w0.154: Q23.3 37.1,7.275 37.1,7.632 38.4,8.932 R15.1
NetQ24_3: Q24.3 R16.1 | length 3.8
  Top Layer w0.154: Q24.3 13.019,8.194 13.019,8.631 13.5,9.112 R16.1
NetQ25_3: Q25.3 R17.1 | length 4.3
  Top Layer w0.154: R17.1 29.169,43.669 29.587,43.669 29.781,43.863 29.781,43.881 30.4,44.5 30.4,45.1 30.55,45.25 Q25.3
NetQ26_3: Q26.3 R18.1 | length 2.2
  Top Layer w0.254: Q26.3 34.375,13.425 35,12.8 R18.1
NetQ27_3: Q27.3 R19.1 | length 1.1
  Top Layer w0.254: Q27.3 9.4,14.025 R19.1
NetQ28_3: Q28.3 R20.1 | length 2
  Top Layer w0.254: R20.1 32.25,39.25 Q28.3
NetQ29_3: Q29.3 R21.1 | length 3.7
  Top Layer w0.154: Q29.3 32.161,7.336 32.161,7.693 33.3,8.832 R21.1
NetQ30_3: Q30.3 R22.1 | length 4.3
  Top Layer w0.154: R22.1 34,43.6 34.4,43.6 35.3,44.5 35.3,45.3 35.35,45.35 Q30.3
NetQ31_3: Q31.3 R23.1 | length 2.3
  Top Layer w0.254: Q31.3 29.375,13.025 29.7,12.7 R23.1
NetQ32_3: Q32.3 R24.1 | length 1.8
  Top Layer w0.254: R24.1 37.75,39.25 Q32.3
VCC_LCD_17: *.17 FDC8.4 | length 11.9
  Top Layer w0.254: *.17 46.797,48.503 v1(47.2,48.1) ; FDC8.4 v1(49.9,40)
  Bottom Layer w0.254: v1(47.2,48.1) 47.2,47.663 48.2,46.663 48.2,41.7 v1(49.9,40)
VCC_LCD_18: *.18 FDC5.4 | length 10.9
  Top Layer w0.254: FDC5.4 v1(44.8,40) ; *.18 44.297,48.503 v1(44.3,48.5)
  Bottom Layer w0.254: v1(44.3,48.5) 44.3,40.5 v1(44.8,40)
VCC_LCD_19: *.19 FDC4.4 | length 7.4
  Top Layer w0.254: *.19 41.797,48.403 42.5,47.7 45.471,47.7 46.15,47.021 FDC4.4
VCC_LCD_20: *.20 FDC3.4 | length 4.2
  Top Layer w0.254: *.20 39.297,48.403 40.05,47.65 40.05,47.313 40.019,47.282 40.019,45.931 FDC3.4
VCC_LCD_29: *.29 FDC2.4 | length 13.2
  Top Layer w0.254: *.29 16.8,49.793 v1(16.8,47.8) ; v1(18,39.6) 18,37.35 FDC2.4
  Bottom Layer w0.254: v1(16.8,47.8) 16.9,47.8 17,47.7 16.8,47.5 16.8,40.8 v1(18,39.6)
VCC_LCD_30: *.30 FDC1.4 | length 13.5
  Top Layer w0.254: FDC1.4 13.4,37.3 v1(14.6,38.5) ; *.30 14.5,49.593 v1(14.5,48.1)
  Bottom Layer w0.254: v1(14.5,48.1) 14.6,48 v1(14.6,38.5)
VCC_LCD_31: *.31 FDC7.4 | length 6.1
  Top Layer w0.254: *.31 11.797,48.603 14.45,45.95 FDC7.4
VCC_LCD_32: *.32 FDC6.4 | length 5.3
  Top Layer w0.254: *.32 9.297,48.403 10.05,47.65 FDC6.4
VCC_LCD_SIGN_17: FDC8.1 U1.4 | length 20
  Top Layer w0.254: U1.4 36.9,25.9 47.15,36.15 FDC8.1
VCC_LCD_SIGN_18: FDC5.1 U1.5 | length 16.9
  Top Layer w0.254: U1.5 36.6,26.7 42.05,32.15 FDC5.1
VCC_LCD_SIGN_19: FDC4.1 U1.6 | length 23.9
  Top Layer w0.254: U1.6 36.4,27.5 40.9,32 v1(40.9,33) ; v1(43.1,43.4) 44.15,43.4 FDC4.1
  Bottom Layer w0.254: v1(40.9,33) 43.481,35.581 43.481,43.019 v1(43.1,43.4)
VCC_LCD_SIGN_20: FDC3.1 U1.7 | length 20.3
  Top Layer w0.254: U1.7 35.7,28.3 39.7,32.3 v1(39.7,33) ; FDC3.1 38.15,42.15 v1(38.2,42.1)
  Bottom Layer w0.254: v1(38.2,42.1) 38.2,34.5 v1(39.7,33)
VCC_LCD_SIGN_29: FDC2.1 U1.20 | length 13.4
  Top Layer w0.254: v1(16.1,33.5) 16.15,33.55 FDC2.1 ; v1(24.3,36) 24.6,35.7 U1.20
  Bottom Layer w0.254: v1(16.1,33.5) 16.5,33.9 21.9,33.9 24,36 v1(24.3,36)
VCC_LCD_SIGN_30: FDC1.1 U1.21 | length 18.7
  Top Layer w0.254: v1(10.3,33.4) 10.8,33.4 11.15,33.75 FDC1.1 ; U1.21 v1(23.8,34.8)
  Bottom Layer w0.254: v1(10.3,33.4) 10.6,33.7 11.337,33.7 11.718,34.081 12.282,34.081 13.482,32.881 15.756,32.881 15.818,32.819 16.382,32.819 16.444,32.881 21.881,32.881 v1(23.8,34.8)
VCC_LCD_SIGN_31: FDC7.1 U1.22 | length 16.6
  Top Layer w0.254: v1(12.5,41) 12.5,42.15 FDC7.1 ; v1(20.463,36.5) 22.371,34.592 22.908,34.592 23,34.5 U1.22
  Bottom Layer w0.254: v1(12.5,41) 12.5,39.6 14.392,37.708 18.21,37.708 19.418,36.5 v1(20.463,36.5)
VCC_LCD_SIGN_32: FDC6.1 U1.23 | length 21.1
  Top Layer w0.254: v1(8.15,39.65) FDC6.1 ; v1(19.5,35.7) 19.5,32.3 20.3,31.5 U1.23
  Bottom Layer w0.254: v1(8.15,39.65) 10.6,37.2 18,37.2 v1(19.5,35.7)
VCC_MICRO: C1.1 C3.1 C5.1 J1.2 R25.2 U1.9 U1.19 U1.31 U2.4 | length 66.1
  Top Layer w0.254: C3.1 8.425,27.525 9,28.1 U2.4 12.8,28.1 13.5,28.8 R25.2@14.7,28.8 ; R25.2 15.4,28.8 16.1,29.5 C1.1@17.075,29.5 ; v1(16.6,28.4) 16.6,29.025 C1.1@17.075,29.5 ; C1.1 C1.1@17.075,29.5 ; v1(19.7,25.1) U1.31 24.5,25.1 ; U1.19 25.4,27.3 24.5,26.4 24.5,25.1 ; v1(34.9,29.9) U1.9 29.8,29.9 25,25.1 24.5,25.1 ; v1(44.6,30.7) 44.6,30.8 45.3,31.5 C5.1 46.025,30.175 48.44,27.76 J1.2
  Bottom Layer w0.254: v1(16.6,28.4) 16.6,28.2 v1(19.7,25.1) ; v1(34.9,29.9) 43.9,29.9 44.6,30.6 v1(44.6,30.7)
pads on no net: U1.34 U1.36 U1.37 U1.39 U2.2

## Polygon pours and split planes (outlines as drawn)
GND on Top Layer "Top Layer-No Net" (solid, shelved, pour order 0): 0,54.2 0,0 56.1,0 56.1,54.2
GND on Bottom Layer "Top Layer-No Net" (solid, shelved, pour order 2): 0,54.2 0,0 56.1,0 56.1,54.2

## Silkscreen, mask and mechanical layers (free items; w line width, h text height)
Bottom Overlay:
  text "Sleek Imponator Rev 1.0 / Ole Sivert Aarhaug" at 55.6,53.3 h1.52 r90
Mechanical 1:
  the board outline again, w0.1